# EAGLE board YOTSUBA_-Y-Z_ver.1.3 (EAGLE 9.6.2)
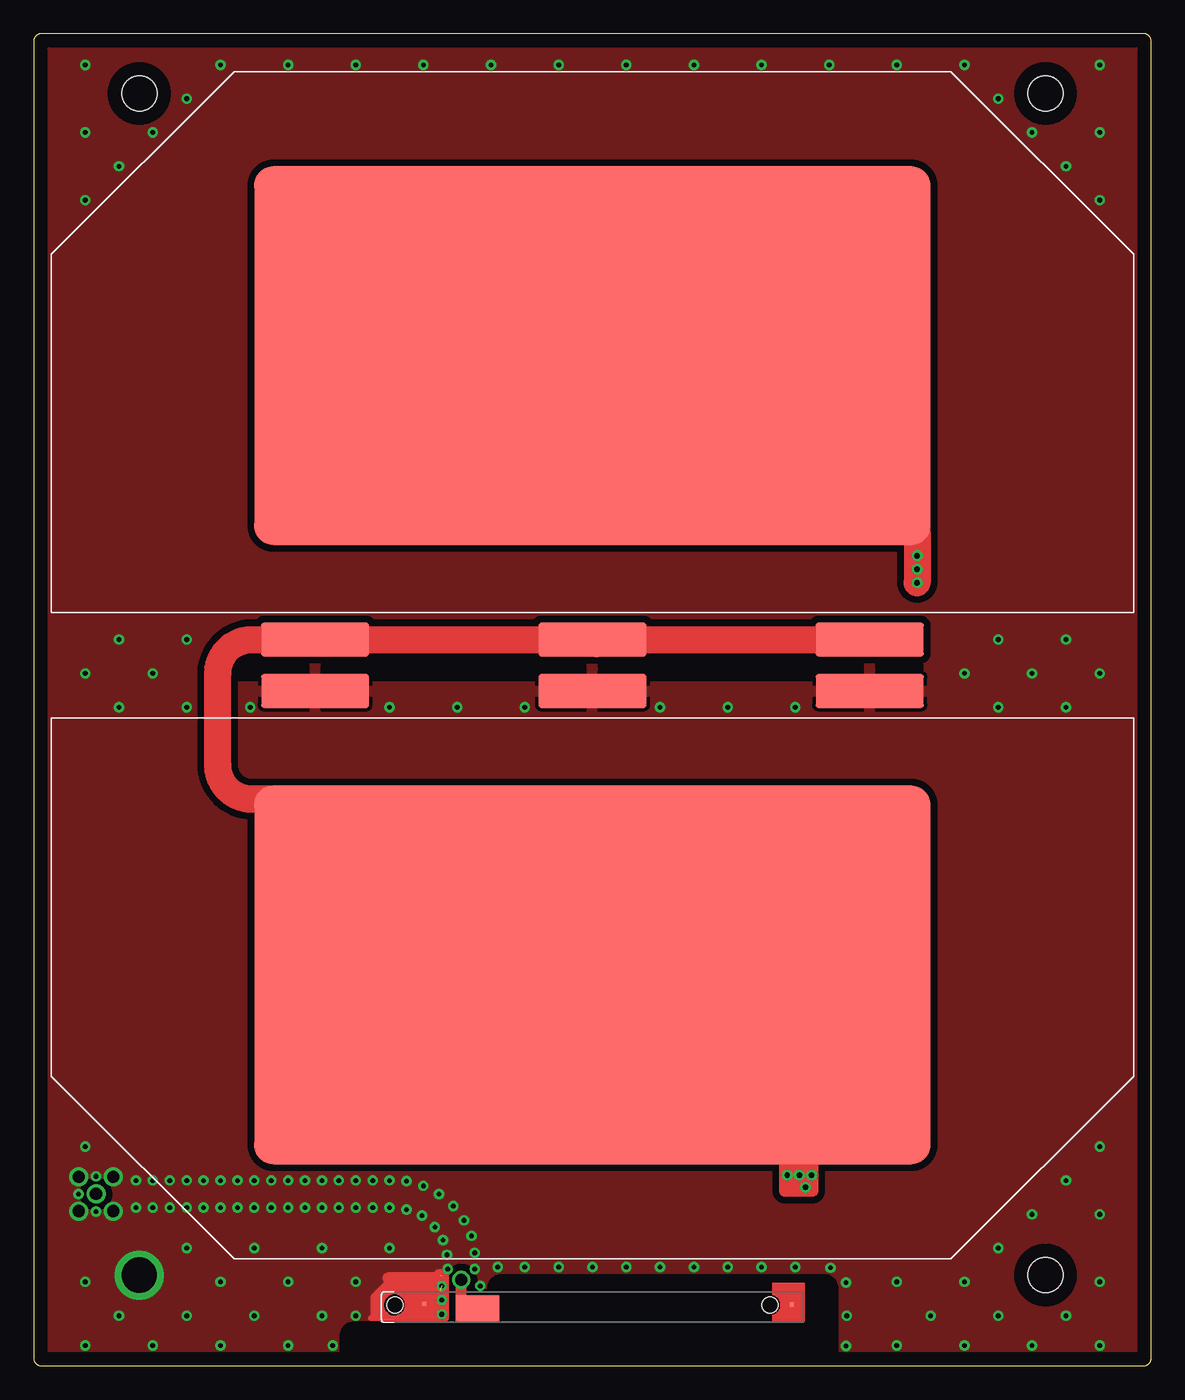
[diagram p0: board, top side]
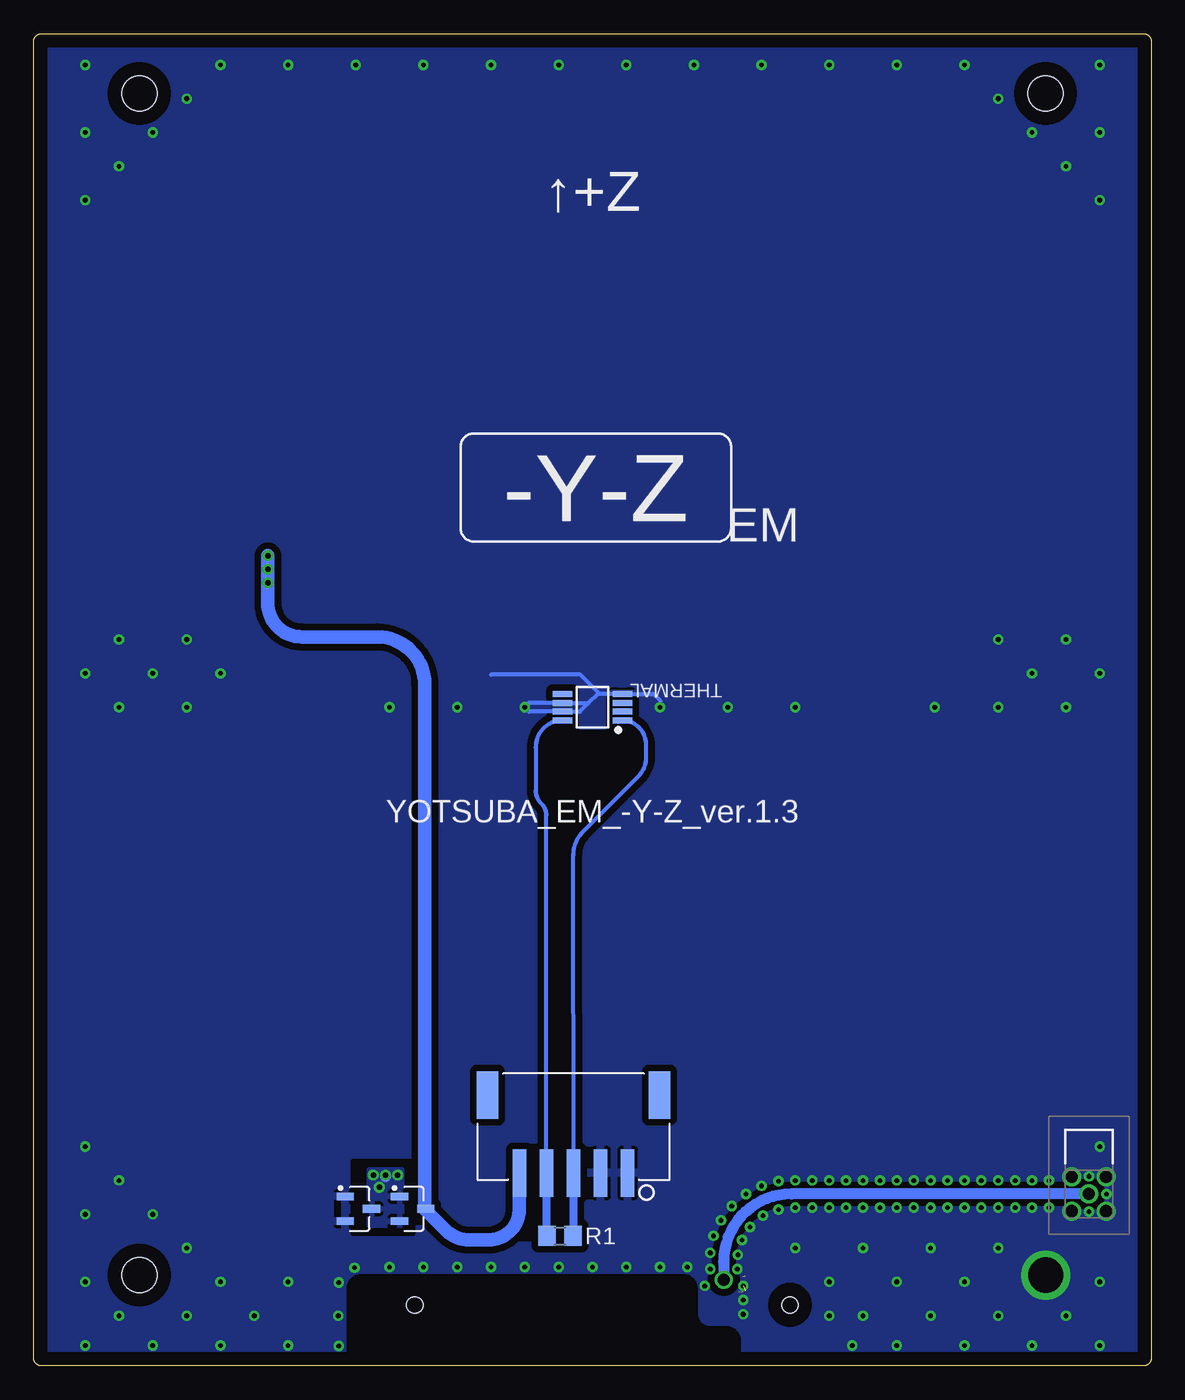
[diagram p1: board, bottom side, seen from below]

Size 82.6 x 98.5 mm. Coordinates in mm from the lower left corner, seen from the top.
Outline: 0,98 0,0.5 arc90 0.5,0 82.1,0 arc90 82.6,0.5 82.6,98 arc90 82.1,98.5 0.5,98.5 arc90 0,98
Copper layers (1*16): Top 0.035mm / dielectric 1.2mm / Bottom 0.035mm
Design rules "default *": minimum track width 6mil, minimum drill 0.35mm, track to track 6mil, track to pad 6mil, pad to pad 6mil, via to via 6mil, smd to smd 6mil, copper to edge 40mil, drill to drill 6mil, minimum pad ring 10mil, minimum via ring 8mil, stop-mask expansion 4mil, vias tented up to drill 30mil, thermal gap 10mil
Net classes: 2 GND: clearance 0.5 mm to class 0, clearance 0.21 mm to class 1, clearance 0.5 mm
Holes 2.6 mm at 74.8,6.7 7.8,94.1 74.8,94.1
tRestrict: 12 lines
bRestrict: 18 lines

## Footprints (pad centres in the part's own frame; a part is rotated, then mirrored left to right if it is on the bottom)
ANTENNA_1002427 = smd 3.2 x 1.9: 1 24.1,-1.05 | smd 0.3 x 0.3: 2 28.02,-1.375; 3 0.875,-1.325 | hole 1.2: 2.46,-1.3; 30.2,-1.3
MMCXLRPC140 = drill 0.9 pad 1.4: 1 0,0; 2 -1.27,-1.27; 3 1.27,-1.27; 4 1.27,1.27; 5 -1.27,1.27
R0805 = smd 1.3 x 1.5: 1 -0.95,0; 2 0.95,0
SOP65P490X110-8N = smd 1.425 x 0.45: 1 -2.212,0.975; 2 -2.212,0.325; 3 -2.212,-0.325; 4 -2.212,-0.975; 5 2.212,-0.975; 6 2.212,-0.325; 7 2.212,0.325; 8 2.212,0.975
SOT23_BAT_DIO = smd 0.568 x 1.259: 1 -0.915,-0.965; 2 0.915,-0.965; 3 0,0.965
SOLAR_3G30A = smd 50 x 28: +V 0,19 | smd 8 x 2.5: -V@1 -20.5,-2; -V@2 20.5,-2; -V@3 0,-2
CONN_S5B-PH-SM4-TB_JST = smd 0.991 x 3.505: 1 4,-3.453; 2 2,-3.453; 3 0,-3.453; 4 -2,-3.453; 5 -4,-3.453 | smd 1.6 x 3.505: 6 -6.35,2.297; 7 6.35,2.297

## Placement (x,y rotation side)
ANT1  1002427  [ANTENNA_1002427]  56.9,3.2 180 top
J1  MMCX-LR-PC-1_40_  [MMCXLRPC140]  4.6,12.7 90 bottom
R1  10k  [R0805]  43.7,9.6 0 bottom
THERMAL  DS28EA00U+  [SOP65P490X110-8N]  41.3,48.7 180 bottom
U1  BAT1000-7-F  [SOT23_BAT_DIO]  54.6,11.6 270 bottom
U2  BAT1000-7-F  [SOT23_BAT_DIO]  58.6,11.6 270 bottom
U$2  3G30A  [SOLAR_3G30A]  41.3,55.7 0 top
U$3  3G30A  [SOLAR_3G30A]  41.3,47.9 180 top
U$9  S5B-PH-SM4-TB(LF)(SN)  [CONN_S5B-PH-SM4-TB_JST]  42.7,17.7 0 bottom

## Library data of the parts
ANT1 = 1002427; DESCRIPTION: 868MHz, 915MHz, 1.575GHz Beidou, GLONASS, GPS, ISM, LoRa, LPWAN, Sigfox Stamped Metal RF Antenna 868MHz, 915MHz, 1.561GHz ~ 1.602GHz 3dBi Solder Surface Mount; DIGI-KEY_PART_NUMBER: 478-1002427TR-ND; MF: Ethertronics/AVX; MP: 1002427; PACKAGE: None; PURCHASE-URL: https://pricing.snapeda.com/search/part/1002427/?ref=eda
J1 = MMCX-LR-PC-1_40_; DESCRIPTION: RF Connectors / Coaxial Connectors MINI PUSH-ON CONN RECEPT RA; HEIGHT: 3.95mm; MANUFACTURER_NAME: Hirose; MANUFACTURER_PART_NUMBER: MMCX-LR-PC-1(40); MOUSER_PART_NUMBER: 798-MMCX-LR-PC-1(40); MOUSER_PRICE-STOCK: https://www.mouser.co.uk/ProductDetail/Hirose-Connector/MMCX-LR-PC-140?qs=XQjbzJWzFPVvtPijmLd%2FXQ%3D%3D
R1 = rcl; SPICEPREFIX: R
THERMAL = DS28EA00U+; ARROW_PART_NUMBER: DS28EA00U+; ARROW_PRICE-STOCK: https://www.arrow.com/en/products/ds28ea00u/maxim-integrated?region=nac; DESCRIPTION: Maxim DS28EA00U+ Temperature Sensor 8-Pin uMAX, -40 +85 C; HEIGHT: 1.1mm; MANUFACTURER_NAME: Analog Devices; MANUFACTURER_PART_NUMBER: DS28EA00U+; MOUSER_PART_NUMBER: 700-DS28EA00U; MOUSER_PRICE-STOCK: https://www.mouser.co.uk/ProductDetail/Maxim-Integrated/DS28EA00U%2b?qs=7H2Jq%252ByxpJJHHt%2F9DIHuNA%3D%3D
U1 U2 = BAT1000; COPYRIGHT: Copyright (C) 2023 Ultra Librarian. All rights reserved.; DIGIKEY_PART_NUMBER_1: BAT1000-7FDITR-ND; DIGIKEY_PART_NUMBER_2: BAT1000-7FDICT-ND; DIGIKEY_PART_NUMBER_3: BAT1000-7FDIDKR-ND; MANUFACTURER_PART_NUMBER: BAT1000-7-F; MFR_NAME: Diodes Inc
U$2 U$3 = 3G30A_normal
U$9 = S5B-PH-SM4; COPYRIGHT: Copyright (C) 2023 Ultra Librarian. All rights reserved.; DIGIKEY_PART_NUMBER_1: 455-1752-2-ND; DIGIKEY_PART_NUMBER_2: 455-1752-1-ND; DIGIKEY_PART_NUMBER_3: 455-1752-6-ND; MANUFACTURER_PART_NUMBER: S5B-PH-SM4-TB(LF)(SN); MFR_NAME: JST

## Nets
GND [GND]: ANT1.2 J1.2 J1.3 J1.4 J1.5 THERMAL.4 THERMAL.6 THERMAL.7 U2.1 U2.2 U$3.-V@1 U$3.-V@2 U$3.-V@3 U$9.1 U$9.2
N$5: U1.1 U1.2 U2.3 U$2.-V@1 U$2.-V@2 U$2.-V@3 U$3.+V
N$6: U1.3 U$2.+V U$9.5
RF2 [ANTENNA]: ANT1.1 J1.1
THERMAL: R1.2 THERMAL.1 U$9.3
VDD_CONST: R1.1 THERMAL.8 U$9.4

## Tracks (layer width: path | path; a pad name or v marks a point on that pad's centre or on a via)
GND  (via drill 0.35, 2.6)  (3 unrouted)
  Top 0.2: ANT1.2 29.34,3.5
  Top 0.4: 29.34,3.5 24.9,3.5 | 25.4,3.8 26,3.8 | 30.5,5.45 30.5,3.5
  Top 0.8: ANT1.2 30.1,4.58 30.1,6.5 26.9,6.5 | 26.9,6.5 26.2,6.5 | 26.9,6.5 26.9,5.7 26.1,5.7
  Top 1: 25.4,5 25.4,3.8 | 30,6.65 30,5.55 | 30.2,6.6 30.2,5.5
  Top 1.016: 26.1,5.7 25.4,5
  Bottom 0.3: 48.8,51.1 42.2,51.1 40.85,49.75 | 40.85,49.75 40.77,49.67 THERMAL.4 36.83,49.67 36.8,49.7 36.3,49.2 v36.3,48.7 | 41.6,49 40.85,49.75 | 41.6,49 43.41,49 THERMAL.6 45.98,49.02 v46.3,48.7 45.98,48.38 THERMAL.7 42.23,48.38 41.6,49
  other vias: 34.3,7.3 31.3,48.7 26.3,48.7 16,48.7 51.3,48.7 56.3,48.7 71.3,48.7 68.8,51.2 73.8,51.2 78.8,51.2 76.3,48.7 78.8,16.2 76.3,13.7 78.8,11.2 78.8,6.2 73.8,11.2 71.3,8.7 68.8,6.2 63.8,6.2 60.1,3.7 63.8,1.5 66.3,3.7 71.3,3.7 68.8,1.5 73.8,1.5 76.3,3.7 78.8,1.5 23.8,11.7 21.3,13.7 16.3,13.7 21.3,8.7 16.3,8.7 6.3,48.7 11.3,48.7 8.8,51.2 3.8,51.2 6.3,53.7 11.3,53.7 71.3,53.7 76.3,53.7 3.8,86.2 6.3,88.7 3.8,91.2 3.8,96.2 8.8,91.2 11.3,93.7 13.8,96.2 18.8,96.2 23.8,96.2 28.8,96.2 33.8,96.2 38.8,96.2 43.8,96.2 48.8,96.2 53.8,96.2 58.8,96.2 63.8,96.2 68.8,96.2 71.3,93.7 73.8,91.2 76.3,88.7 78.8,86.2 78.8,91.2 78.8,96.2 18.8,1.5 13.8,1.5 8.8,1.5 11.3,3.7 6.3,3.7 3.8,1.5 3.8,6.2 30.15,3.8 11.3,13.7 7.8,6.7 3.8,16.2 13.8,13.7 12.55,13.7 15.05,13.7 10.05,13.7 8.8,13.7 7.55,13.7 17.55,13.7 18.8,13.7 20.05,13.7 22.55,13.7 23.8,13.7 22.55,11.7 21.3,11.7 20.05,11.7 18.8,11.7 17.55,11.7 16.3,11.7 15.05,11.7 13.8,11.7 12.55,11.7 11.3,11.7 10.05,11.7 8.8,11.7 7.55,11.7 4.6,14 3.3,12.7 4.6,11.4 16.3,3.7 21.3,3.7 18.8,6.2 13.8,6.2 11.3,8.7 23.8,6.2 26.3,8.7 36.3,7.3 41.3,7.3 46.3,7.3 51.3,7.3 56.3,7.3 60.05,1.45 60.05,6.15 23.8,3.7 22.1,1.5 30.15,4.85 33,5.9 25.05,13.7 25.05,11.7 26.3,11.7 26.3,13.7 38.8,7.3 43.8,7.3 48.8,7.3 53.8,7.3 58.9,7.25 27.55,13.65 28.8,13.3 27.55,11.55 28.7,11.1 29.65,10.25 30.25,9.3 30.55,8.2 29.95,12.7 31,11.8 31.8,10.75 32.35,9.6 32.6,8.35 30.6,7.15 32.6,7.15 30.15,5.9
  pour Top: 88.65,102.6 -4.35,102.6 arc90 -4.6,102.35 -4.6,-6.15 arc90 -3.85,-6.9 88.9,-6.9 88.9,102.35 arc90
  pour Bottom: -4.9,-5.6 -4.9,103.1 arc-90 -3.9,104.1 86.3,104.1 arc-90 87.3,103.1 87.3,-5.6 arc-90 86.3,-6.6 -3.9,-6.6 arc-90
N$5  (via drill 0.4)
  Top 0.8: U$3.+V 57.6,28.9 57.6,12.9 55.5,12.9 55.5,14.4 | 55.5,14.4 55.5,15 57.2,15 57.2,14.4 v57.5,14.1 57.2,13.8 | 56.6,14 56,14 56,13.1 56.6,13.1 56.6,13.2 | v56.6,14.1 56.6,13.2 | v56.6,14.1 56.6,14.4 55.5,14.4 | v56.6,14.1 56.9,13.8 57.2,13.8 | 57.2,13.8 57.2,13.4 v57.05,13.2 56.6,13.2
  Top 2: U$2.-V@3 41.6,53.4 41.8,53.6 | 41.8,53.6 41.5,53.6 U$2.-V@3 | U$3.+V 21.6,28.9 21.6,41.9 16.1,41.9 arc-90 13.6,44.4 13.6,51.2 arc-90 16.1,53.7 U$2.-V@1 41.8,53.7 41.8,53.6 | U$2.-V@3 U$2.-V@2 61.8,53.8
  Bottom 0.8: v56.6,14.1 56.6,14
  other vias: 55.7,14.1
  pour Bottom: 55.4,14.5 57.8,14.5 57.8,10.4 55.4,10.4
N$6  (via drill 0.4)
  Top 2: U$2.+V 41.59,74.7 54.3,61.7 65.3,61.7 v65.3,57.9
  Bottom 1: v65.3,59.9 v65.3,58.9 v65.3,57.9 65.3,56.4 arc-90 62.8,53.9 57.2,53.9 arc90 53.7,50.4 53.7,11.6 U1.3 53.63,11.5 52.15,10.01 arc-45 50.43,9.3 49.01,9.3 arc-90 46.71,11.6 46.71,14.24 U$9.5
RF2  (via drill 0.9)
  Top 0.152: ANT1.1 31.6,4.25
  Top 0.8: 31.65,6.35 v31.6,6.35 31.6,4.25 | ANT1.1 32.6,4.25
  Bottom 0.8: J1.1 26.6,12.7 arc-90 31.6,7.7 v31.6,6.35
THERMAL
  Bottom 0.3: U$9.3 42.71,37.75 arc45 41.98,39.52 37.89,43.61 arc-45 37.33,44.97 37.33,45.89 arc-90 THERMAL.1 | 42.71,9.8 R1.2
  Bottom 0.6: U$9.3 42.71,14.24 42.71,9.8
VDD_CONST
  Bottom 0.3: THERMAL.8 THERMAL.8 arc-90 45.5,45.73 45.5,42.53 arc-45 45.12,41.62 45.05,41.55 arc45 44.71,40.72 44.7,40.71 44.7,14.4 U$9.4 | 44.71,9.82 R1.1
  Bottom 0.6: 44.7,14.4 44.7,9.65 R1.1
(copper drawn outside any net)
  shapes: Top circle x1

## Text on the board
bNames: ↑+Z | -Y-Z | EM | YOTSUBA_EM_-Y-Z_ver.1.3